# Altium PCB PCB.PcbDoc
Units mil, origin at the board's own origin, x right, y up, seen from the top; angles counter-clockwise.
Board outline 3543.31 x 1574.8 mil, 2 copper layers (Top Layer, Bottom Layer); 60 components, 48 nets, 212 pads, 49 vias.
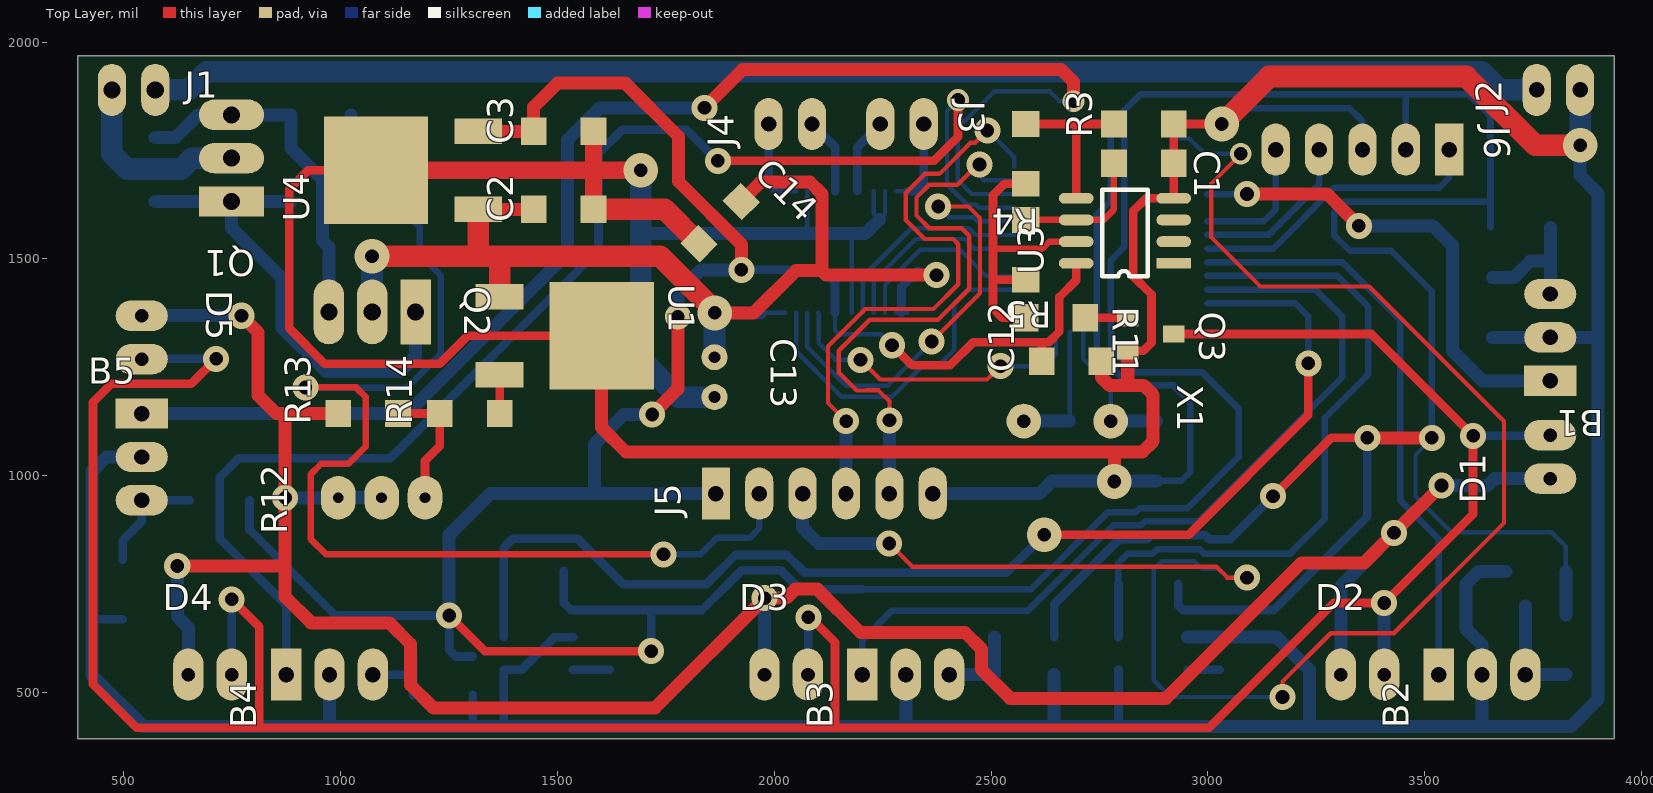
[diagram p0: Top Layer view]
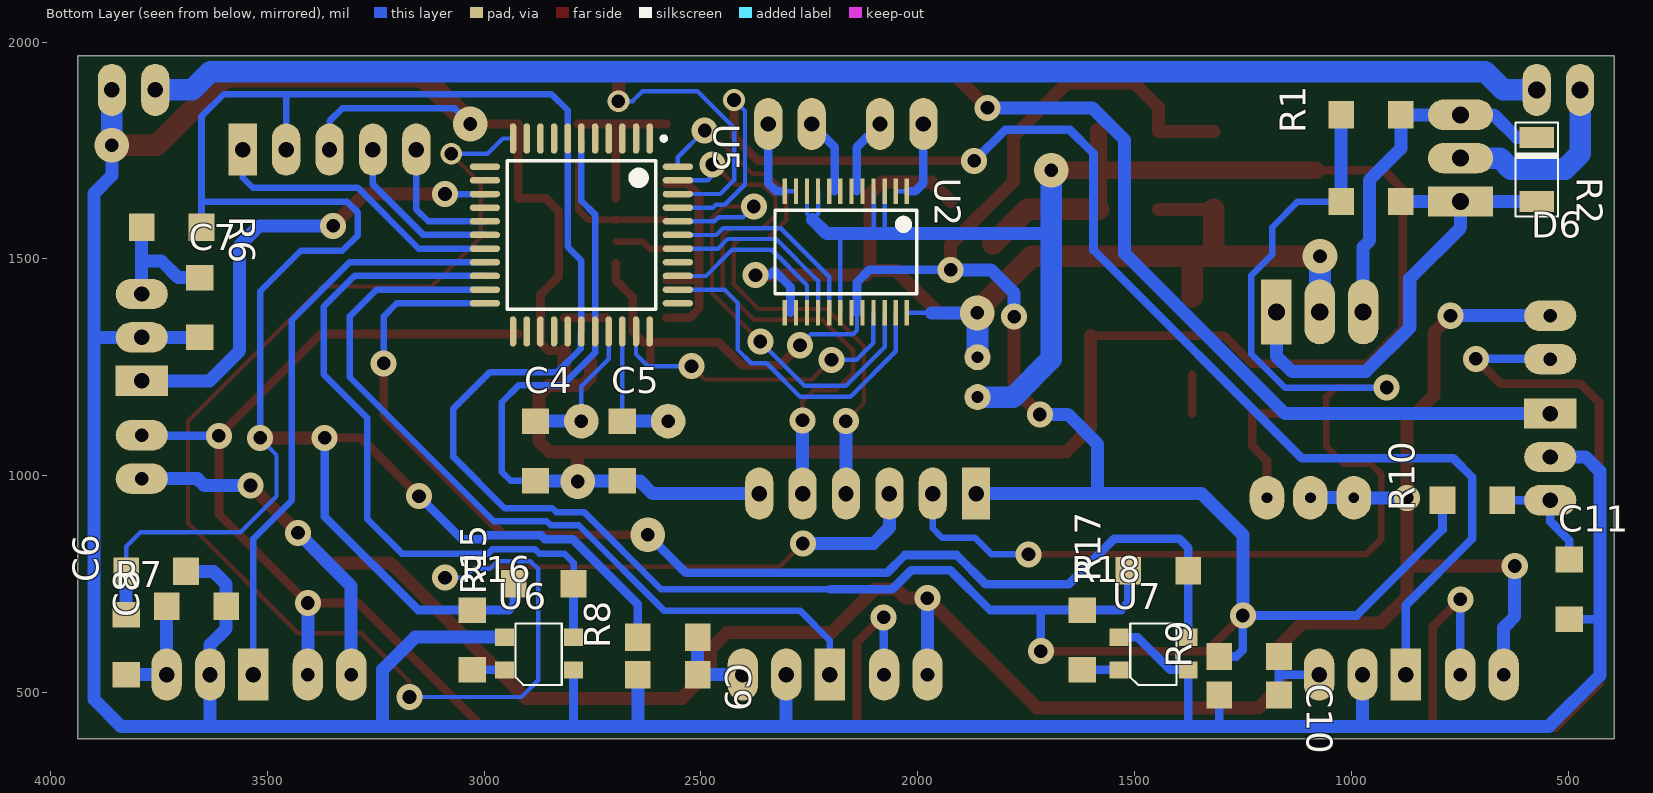
[diagram p1: Bottom Layer view, seen from below]

## Layer stack, top to bottom
Top Solder: solder mask 0.4, Solder Resist, Dk 3.5
Top Layer: signal copper 1.4
Dielectric 1: dielectric 12.6, FR-4, Dk 4.8
Bottom Layer: signal copper 1.4
Bottom Solder: solder mask 0.4, Solder Resist, Dk 3.5

## Board outline
393.7,393.7 3937.01,393.7 3937.01,1968.5 393.7,1968.5

## Design rules (kind name [scope] priority, off if disabled: settings)
Clearance [All] p1: gap=15
PolygonConnect [All] p1: connectstyle=Relief reliefconductorwidth=10 reliefentries=4 polygonreliefangle="90 Angle" airgapwidth=10
RoutingVias [All] p1: holewidth=31.5 width=80 viastyle="Through Hole" minholewidth=31.5 minwidth=50 maxholewidth=31.5 maxwidth=100
SolderMaskExpansion [All] p1: expansion=4
Width [All] p1: maxlimit=50 minlimit=10 preferedwidth=30
30 further rules are at their usual default settings.

## Components (designator, comment, footprint, x,y, rotation, side; value= is the part's Value field where it differs from the comment)
B1 "TSSP58038" TSSP58038 3789.37,1218.9 r180 top
B2 "TSSP58038" TSSP58038 3531.89,541.34 r90 top
B3 "TSSP58038" TSSP58038 2203.15,541.34 r90 top
B4 "TSSP58038" TSSP58038 874.41,541.34 r90 top
B5 "TSSP58038" TSSP58038 541.34,1143.31 r0 top
C1 "CAP-CER" C1206 2852.17,1720.87 r0 top
C2 "CAP-CER" C1206 1514.17,1614.17 r180 top
C3 "CAP-CER" C1206 1514.17,1794.17 r180 top
C4 "CAP-CER" C1206 2881.5,1057.09 r90 bottom
C5 "CAP-CER" C1206 2681.1,1057.09 r90 bottom
C6 "CAP-CER" C1206 3756.3,779.53 r0 bottom
C7 "CAP-CER" C1206 3655.91,1387.8 r90 bottom
C8 "CAP-CER" C1206 3662.99,699.21 r0 bottom
C9 "CAP-CER" C1206 2576.38,541.34 r180 bottom
C10 "CAP-CER" C1206 1235.83,494.49 r180 bottom
C11 "CAP-CER" C1206 497.24,737.8 r90 bottom
C12 "CAP-CER" C1206 2685.43,1263.78 r180 top
C13 "CAP-ELEC" CAP-ELEC-5x11x2mm 1862.2,1212.23 r270 top
C14 "CAP-CER" C1206 1875.1,1583.57 r45 top
D1 "LED" LED-5MM-CLEAR 3789.37,1043.31 r90 top
D2 "LED" LED-5MM-CLEAR 3356.3,541.34 r0 top
D3 "LED" LED-5MM-CLEAR 2027.56,541.34 r0 top
D4 "LED" LED-5MM-CLEAR 698.82,541.34 r0 top
D5 "LED" LED-5MM-CLEAR 541.34,1318.9 r270 top
D6 "1N759" SOD-80 572.44,1706.1 r90 bottom
J1 "Bateria 1" "HEADER 1x2"#1 522.44,1889.76 r90 top
J2 "Bateria 2" "HEADER 1x2"#2 3808.27,1889.76 r90 top
J3 "Motor L" "HEADER 1x2"#2 2294.45,1811.02 r270 top
J4 "Motor R" "HEADER 1x2"#2 2036.97,1811.02 r90 top
J5 "Placa UI" "Header 1x6" 1865.35,958.66 r90 top
J6 "PICkit" "Header 1x5" 3556.3,1751.97 r270 top
Q1 "IRF4905" TO-220 748.03,1632.28 r180 top
Q2 "IRF4905" TO-220 1172.83,1377.95 r270 top
Q3 "MMBT2222A" SOT-23 2941.06,1601.77 r270 top
R1 "RES" R1206 954.72,1832.28 r0 bottom
R2 "RES" R1206 954.72,1632.28 r180 bottom
R3 "RES" R1206 2852.17,1811.02 r180 top
R4 "RES" R1206 2579.53,1742.13 r270 top
R5 "RES" R1206 2579.53,1520.87 r270 top
R6 "RES" R1206 3720.47,1572.83 r180 bottom
R7 "RES" R1206 3825.2,610.24 r90 bottom
R8 "RES" R1206 2576.38,627.56 r0 bottom
R9 "RES" R1206 1235.83,583.07 r0 bottom
R10 "RES" R1206 720.87,943.31 r0 bottom
R11 "RES" R1206 2648.43,1364.57 r0 top
R12 "POT" TRIMPOT 1094.49,949.21 r180 top
R13 "RES" R1206 1063.39,1143.31 r180 top
R14 "RES" R1206 1297.64,1143.31 r180 top
R15 "RES" R1206 2862.6,751.18 r0 bottom
R16 "RES" R1206 3027.56,621.26 r90 bottom
R17 "RES" R1206 1445.28,780.71 r0 bottom
R18 "RES" R1206 1620.87,621.26 r90 bottom
U1 "LM7805" TO-252 1522.05,1322.83 r270 top
U2 "TB6612FNG" SSOP24 2165.71,1515.67 r270 bottom
U3 "LM358D" SOIC-8 3136.06,1489.76 r180 top
U4 "LM7805" TO-252 1161.81,1704.17 r90 top
U5 "PIC18F4550-I/PT" TQFP-PT44_N 2775.59,1555.12 r270 bottom
U6 "QRE1113GR" QRE1113GR 2874.02,590.55 r180 bottom
U7 "QRE1113GR" QRE1113GR 1456.69,590.55 r180 bottom
X1 "XTAL" HC-49/S 2655.59,1125.98 r0 top

## Footprints (in the part's own frame and the unit in brackets; to place one, negate y for a bottom-side part, rotate by r counter-clockwise, add the part's x,y. Pads: shape width x height; smd on the part's side, far side on the other; paste and mask are expansions set on the pad)
C1206 [mm]
  rect 1.5x1.6 smd: 1(-1.75,0) 2(1.75,0)
  body extent -1.6,-0.76 1.6,0.84, height 1.26
CAP-ELEC-5x11x2mm [mil]
  round 60 hole 27.56: 1(-61,0) 2(31,0)
  body extent -114,-99 84,99, height 454
HC-49/S [mil]
  round 80 hole 31.5: 1(-80,0) 2(120,0)
  body extent -203,-90 243,93, height 138
"HEADER 1x2"#1 [mil]
  oval 120x65 hole 39.37: 1(0,50) 2(0,-50)
  body extent -49,-100 49,100, height 336
"HEADER 1x2"#2 [mil]
  oval 120x65 hole 35.43: 1(0,50) 2(0,-50)
  body extent -49,-100 49,100, height 336
"Header 1x5" [mil]
  rect 120x65 hole 35.43: 1(0,0)
  oval 120x65 hole 35.43: 2(0,-100) 3(0,-200) 4(0,-300) 5(0,-400)
  body extent -49,-450 49,50, height 336
"Header 1x6" [mil]
  rect 120x65 hole 35.43: 1(0,0)
  oval 120x65 hole 35.43: 2(0,-100) 3(0,-200) 4(0,-300) 5(0,-400) 6(0,-500)
  body extent -49,-550 49,50, height 336
LED-5MM-CLEAR [mil]
  oval 70x120 hole 31.5: A(-50,0) K(50,0)
  body extent -118,-118 98,118, height 346
QRE1113GR [mm]
  rect 1.1x1 smd: A(-2.01,-0.97) C(2.04,0.94) E(-2.01,0.94) K(2.04,-0.97)
  silkscreen extent -1.35,-1.85 1.35,1.75, body extent -2.4,-1.8 2.4,1.8, height 1.83
R1206 [mm]
  rect 1.5x1.6 smd: 1(-1.75,0) 2(1.75,0)
  body extent -1.6,-0.76 1.6,0.84, height 0.68
SOD-80 [mm]
  rect 1.25x2 smd: A(-1.875,0) K(1.875,0)
  silkscreen extent -2.75,-1.25 2.75,1.25, body extent -1.8,-0.75 1.8,0.75, height 1.5
SOIC-8 [mil]
  rect 80x25 smd: 1(215,0)
  oval 80x25 smd: 2(215,-50) 3(215,-100) 4(215,-150) 5(440,-150) 6(440,-100) 7(440,-50) 8(440,0)
  silkscreen extent 275,-170 380,30, body extent 212,-171 448,21, height 69
SOT-23 [mil]
  rect 40x50 smd: B(237.2,-125.98) C(275,-20) E(313.98,-125.98)
  body extent 218,-124 333,-27, height 38
SSOP24 [mm]
  rect 1.5x0.25 smd: 1(-3.562,3.575) 2(-3.562,2.925) 3(-3.562,2.275) 4(-3.562,1.625) 5(-3.562,0.975) 6(-3.562,0.325) 7(-3.562,-0.325) 8(-3.562,-0.975) 9(-3.562,-1.625) 10(-3.562,-2.275) 11(-3.562,-2.925) 12(-3.562,-3.575) 13(3.562,-3.575) 14(3.562,-2.925) 15(3.562,-2.275) 16(3.562,-1.625) 17(3.562,-0.975) 18(3.562,-0.325) 19(3.562,0.325) 20(3.562,0.975) 21(3.562,1.625) 22(3.562,2.275) 23(3.562,2.925) 24(3.562,3.575)
  silkscreen extent -2.45,-4.15 2.45,4.15, body extent -3.8,-4.15 3.8,4.15, height 1.6
TO-220 [mil]
  rect 150x70 hole 39.37: 1(0,0)
  oval 150x70 hole 39.37: 2(0,-100) 3(0,-200)
  body extent -64,-305 114,101, height 661
TO-252 [mm]
  rect 1.5x2.8 smd: 1(-2.286,-3.95) 3(2.286,-3.95)
  rect 6.3x6.1 smd: 2(0,2.03)
  body extent -3.27,-4.96 3.27,4.98, height 2.41
TQFP-PT44_N [mil] "Thin QFP, 44-Leads, Body 10x10mm, Pitch 0.8mm, IPC Medium Density"
  oval 70x15 smd: 1(-222.44,157.48) 2(-222.44,125.98) 3(-222.44,94.49) 4(-222.44,62.99) 5(-222.44,31.5) 6(-222.44,0) 7(-222.44,-31.5) 8(-222.44,-62.99) 9(-222.44,-94.49) 10(-222.44,-125.98) 11(-222.44,-157.48) 23(222.44,-157.48) 24(222.44,-125.98) 25(222.44,-94.49) 26(222.44,-62.99) 27(222.44,-31.5) 28(222.44,0) 29(222.44,31.5) 30(222.44,62.99) 31(222.44,94.49) 32(222.44,125.98) 33(222.44,157.48)
  oval 15x70 smd: 12(-157.48,-222.44) 13(-125.98,-222.44) 14(-94.49,-222.44) 15(-62.99,-222.44) 16(-31.5,-222.44) 17(0,-222.44) 18(31.5,-222.44) 19(62.99,-222.44) 20(94.49,-222.44) 21(125.98,-222.44) 22(157.48,-222.44) 34(157.48,222.44) 35(125.98,222.44) 36(94.49,222.44) 37(62.99,222.44) 38(31.5,222.44) 39(0,222.44) 40(-31.5,222.44) 41(-62.99,222.44) 42(-94.49,222.44) 43(-125.98,222.44) 44(-157.48,222.44)
  silkscreen extent -227,-171 171,195, body extent -197,-197 197,197, height 47
TRIMPOT [mil]
  oval 80x100 hole 25: 1(-100,0) 2(0,0) 3(100,0)
  body extent -188,-94 188,94, height 455
TSSP58038 [mil]
  rect 120x70 hole 35.43: 1(0,0)
  oval 120x70 hole 35.43: 2(0,-100) 3(0,-200)
  body extent -134,-213 55,15, height 337

## Part data
D6: library part ZENER
J1 J2 J3 J4: library part "Header 1x2"
J5: library part "Header 1x6"
Q1 Q2: library part P-MOSFET
Q3: library part NPN
U1 U4: library part LM78XX
U2: "otor / Motion / Ignition Controllers & Drivers Brush Motor Driver IC"
U3: library part LM358
U5: "High Performance, Enhanced Flash, USB Microcontroller with nanoWatt Technology, 32K Flash, 44-Pin TQFP, Industrial Temperature Range"

## Via types
v1: diameter 60, hole 31.5, Top Layer to Bottom Layer, 39 vias
v2: diameter 80, hole 31.5, Top Layer to Bottom Layer, 7 vias
v3: diameter 50, hole 31.5, Top Layer to Bottom Layer, 3 vias

## Nets (pads, with @x,y where several pads share a name; then routed paths per layer and width w, separated by ;. In a path a pad name is that pad's centre, name@x,y a point inside that pad or via, vN(x,y) a via of type N, cw(c..) or ccw(c..) an arc to the next point about the centre after c; other vN are vias at no path point)
38KHZ: R4.2 R5.2 R11.1 U3.7 | length 704.7
  Top Layer w15: 2504.33,1523.23 2617.32,1523.23 2633.86,1539.76 U3.7
  Top Layer w20: R11.1 2525.59,1364.57 2504.33,1385.83 2504.33,1451.97 ; R5.2 2504.33,1451.97 ; R4.2 2531.1,1673.23 2504.33,1646.46 2504.33,1523.23 2504.33,1451.97
BTN1: J5.5 U5.43 | length 1359.2
  Top Layer w10: v1(2265.75,1127.56) 2265.75,1169.69 2266.54,1170.47 2240.24,1196.77 2213.31,1196.77 2212.99,1196.46 2190.16,1196.46 2148.82,1237.8 2148.82,1288.03 2220.23,1359.45 2377.64,1359.45 2449.33,1431.14 2449.33,1553.43 2431.89,1570.86 2357.24,1570.86 2327.95,1600.15 2327.95,1641.57 2357.4,1671.02 2422.2,1671.02 2468.95,1717.77 v1(2473.15,1717.77)
  Bottom Layer w10: v1(2473.15,1717.77) 2473.15,1692.2 2484.25,1681.1 U5.43
  Bottom Layer w30: J5.5@2265.35,959.06 2265.75,959.45 v1(2265.75,1127.56)
BTN2: J5.4 U5.44 | length 1372.9
  Top Layer w10: v1(2165.75,1125.98) 2123.82,1167.91 2123.82,1298.39 2209.88,1384.45 2367.28,1384.45 2424.33,1441.5 2424.33,1533.94 2412.4,1545.86 2346.88,1545.86 2302.95,1589.8 2302.95,1651.93 2347.04,1696.02 2380.69,1696.02 2452.44,1767.77 2463.05,1767.77 v1(2491.34,1796.06)
  Bottom Layer w10: v1(2491.34,1796.06) 2553.15,1734.25 U5.44
  Bottom Layer w30: J5.4@2165.35,959.06 2165.75,959.45 v1(2165.75,1125.98)
CNY1: R15.1 U5.20 U6.C | length 1629.4
  Bottom Layer w15: R15.1 2793.7,799.21 2814.96,820.47 2872.59,820.47 2882.29,830.18 2980.7,830.18 2990.4,820.47 3189.37,820.47 3269.68,900.79 3269.68,1133.46 3369.68,1233.46 3369.68,1390.16 3300.96,1458.88 3299.36,1458.88 3297.61,1460.63 U5.20
  Bottom Layer w20: U6.C R15.1
CNY2: R17.1 U5.22 U7.C | length 2782.1
  Top Layer w20: v2(2622.44,864.17) 2955.51,864.17 3231.5,1140.16 v1(3231.5,1259.06)
  Bottom Layer w15: U5.22 3201.18,1397.64 3231.5,1367.32 v1(3231.5,1259.06)
  Bottom Layer w20: U7.C R17.1 1376.38,833.86 1396.85,854.33 1547.05,854.33 1651.77,749.61 1843.02,749.61 1910.7,817.28 2029.46,817.28 2070.36,776.38 2534.64,776.38 v2(2622.44,864.17)
GND: B1.2 B2.2 B3.2 B4.2 B5.2 C1.2 C2.1 C3.1 C4.1 C5.1 C6.1 C7.1 C8.1 C9.1 C10.1 C11.1 C12.1 C13.2 C14.1 J2.2 J5.6 J6.3 Q3.E R3.1 U1.2 U2.3 U2.4 U2.9 U2.10 U2.18 U3.4 U4.2 U5.6 U5.29 U6.E U6.K U7.E U7.K | length 17379.2
  Top Layer w20: U4.2 925.43,1704.17 881.5,1660.24 881.5,1339.76 962.99,1258.27 1228.74,1258.27 1293.31,1322.83 U1.2 ; Q3.E 2850.59,1287.8 2869.68,1306.89 2869.68,1418.11 2827.95,1459.84 2827.95,1610.24 2857.48,1639.76 U3.4 C1.2 R3.1 v2(3031.5,1811.02)
  Top Layer w30: U1.2 1601.97,1110.63 1657.87,1054.72 2784.25,1054.72 ; C12.1 2754.33,1226.77 2772.56,1208.54 2815.08,1208.54 ; v2(2784.25,986.61) 2784.25,1054.72 ; Q3.E 2815.08,1208.54 ; 2784.25,1054.72 2848.82,1054.72 2873.62,1079.53 2873.62,1186.61 2851.69,1208.54 2815.08,1208.54
  Top Layer w40: U4.2 1583.07,1704.17 ; C2.1 1583.07,1704.17 ; C3.1 1583.07,1704.17 ; v2(1691.73,1704.17) 1583.07,1704.17
  Top Layer w50: C2.1 1747.05,1614.17 C14.1 ; v2(3031.5,1811.02) 3140.94,1920.47 3596.06,1920.47 3754.72,1761.81 v2(3858.27,1761.81)
  Bottom Layer w10: 2076.14,1558.19 U2.3 ; 2101.73,1558.19 U2.4 ; U2.18 2178.5,1558.19 ; U2.9 2229.69,1603.74 2242.48,1590.94 2255.28,1603.74 U2.10
  Bottom Layer w15: U5.6 2775.59,1633.86 2744.09,1602.36 U5.29 2744.09,1283.32 2818.36,1209.06 2919.68,1209.06 2959.06,1169.68 2959.06,1008.66 2938.58,988.19 C4.1 ; v2(3031.5,1811.02) 3067.32,1846.85 3327.17,1846.85 3356.3,1817.72 J6.3
  Bottom Layer w20: 427.17,668.9 C11.1 ; 1304.72,422.05 C10.1 ; 1376.38,422.05 U7.K 1417.72,552.36 1492.91,627.56 U7.E ; 2793.7,422.05 U6.K
  Bottom Layer w30: B5.2 459.84,1043.31 427.17,1010.63 427.17,668.9 427.17,539.37 544.49,422.05 974.41,422.05 ; B4.2 974.41,422.05 ; 1691.73,1558.19 2076.14,1558.19 2101.73,1558.19 2178.5,1558.19 2209.72,1558.19 2242.48,1590.94 ; B3.2 2303.15,422.05 ; J5.6 2611.42,958.66 2640.94,988.19 C5.1 C4.1 ; C9.1 2645.28,422.05 ; U6.E 3159.05,627.56 3233.86,552.76 3233.86,422.05 ; C7.1 B1.2 3899.21,1318.9 ; C6.1 3624.41,779.53 3594.88,750 3594.88,647.24 3631.89,610.24 B2.2 3631.89,422.05 ; v2(3858.27,1761.81) 3858.27,1692.13 3899.21,1651.18 3899.21,1318.9 ; 974.41,422.05 1304.72,422.05 1376.38,422.05 2303.15,422.05 ; 2303.15,422.05 2645.28,422.05 ; 2645.28,422.05 2793.7,422.05 3233.86,422.05 ; 3233.86,422.05 3631.89,422.05 ; 3631.89,422.05 3837.4,422.05 3899.21,483.86 3899.21,1318.9
  Bottom Layer w50: v2(1691.73,1704.17) 1691.73,1558.19 1691.73,1269.29 1779.8,1181.23 C13.2 ; v2(3858.27,1761.81) J2.2
IR1: B1.1 U5.14 | length 1112
  Top Layer w30: v1(3090.16,1649.61) 3274.8,1649.61 v1(3348.03,1576.38)
  Bottom Layer w15: U5.14 v1(3090.16,1649.61)
  Bottom Layer w30: v1(3348.03,1576.38) 3518.11,1576.38 3563.39,1531.1 3563.39,1288.19 3632.68,1218.9 B1.1
IR2: B2.1 U5.19 | length 1357.2
  Bottom Layer w15: U5.19 3310.14,1492.13 3443.7,1358.57 3443.7,942.91 3531.89,854.72 3531.89,547.34 B2.1@3525.89,541.34
IR3: B3.1 U5.21 | length 1914.1
  Bottom Layer w15: B3.1 2203.15,620.87 2270.47,688.19 2583.96,688.19 2781.81,886.04 2846.24,886.04 2855.37,895.18 2977.46,895.18 3309.45,1227.17 3309.45,1367.32 3247.64,1429.13 U5.21
IR4: B4.1 U5.41 | length 3204.6
  Top Layer w20: v1(1869.72,1726.02) 2368.27,1726.02 2423.62,1781.38 v3(2423.62,1866.54)
  Bottom Layer w10: v3(2423.62,1866.54) 2398.15,1841.06 2398.15,1670.86 2398.66,1670.86 2444.92,1624.61 2465.63,1624.61 2472.13,1618.11 U5.41
  Bottom Layer w20: B4.1 874.41,701.57 720.87,855.12 720.87,996.06 765.35,1040.55 1114.57,1040.55 1594.49,1520.47 1594.49,1742.91 1649.61,1798.03 1797.72,1798.03 v1(1869.72,1726.02)
IR5: B5.1 U5.42 | length 3261.5
  Top Layer w30: v1(1838.98,1848.43) 1927.17,1936.61 2661.42,1936.61 2690.16,1907.87 v3(2690.16,1863.78)
  Bottom Layer w10: U5.42 2455.27,1649.61 2437.35,1667.53 2437.35,1667.77 2423.15,1681.97 2423.15,1801.89 2507.8,1886.54 2634.72,1886.54 2657.48,1863.78 v3(2690.16,1863.78)
  Bottom Layer w30: B5.1 1153.54,1143.31 1522.83,1512.6 1522.83,1774.02 1597.24,1848.43 v1(1838.98,1848.43)
LED: J5.3 U5.11 | length 4120.4
  Top Layer w10: v1(2264.96,843.7) 2318.5,790.16 3019.68,790.16 3044.88,764.96 v1(3090.16,764.96) ; v3(3075.98,1742.12) 3007.87,1674.01 3007.87,1549.21 3120.87,1436.22 3372.05,1436.22 3682.68,1125.59 3682.68,890.95 3428.35,636.61 3283.07,636.61 3172.05,525.59 v1(3172.05,489.76)
  Bottom Layer w10: U5.11 2957.09,1777.56 2992.52,1742.12 v3(3075.98,1742.12) ; v1(3090.16,764.96) 3044.88,764.96 3024.35,785.49 2986.49,785.49 2969.31,802.68 2893.68,802.68 2883.98,792.97 2882.68,792.97 2875.2,785.49 2875.2,528.35 2913.78,489.76 v1(3172.05,489.76)
  Bottom Layer w30: J5.3@2065.35,959.06 J5.3 2065.35,880.32 2101.97,843.7 v1(2264.96,843.7)
MOTDA: U2.21 U5.32 | length 728.7
  Top Layer w10: v1(2198.82,1267.32) 2244.37,1221.77 2490.67,1221.77 v1(2521.65,1252.75)
  Bottom Layer w10: U2.21 2102.4,1374.76 2102.4,1305.87 2140.94,1267.32 v1(2198.82,1267.32) ; v1(2521.65,1252.75) 2622.44,1252.75 2649.61,1279.92 U5.32
MOTDB: U2.22 U5.40 | length 1072.8
  Top Layer w10: v1(2362.99,1309.45) 2474.33,1420.79 2474.33,1594.57 2448.03,1620.86 v1(2377.95,1620.86)
  Bottom Layer w10: U2.22 2076.14,1296.77 2165.59,1207.32 2260.87,1207.32 v1(2362.99,1309.45) ; v1(2377.95,1620.86) 2402.95,1595.86 2459.02,1595.86 2468.27,1586.61 U5.40
MOTDP: U2.23 U5.35 | length 799.9
  Bottom Layer w10: U2.23 2050.55,1287.01 2155.23,1182.32 2271.22,1182.32 2348.35,1259.45 2383.7,1259.45 2415.35,1291.1 2415.35,1399.21 2445.28,1429.13 U5.35
MOTIA: U2.17 U5.39 | length 485.5
  Bottom Layer w10: U2.17 2204.09,1458.96 2315.99,1570.86 2448.67,1570.86 2464.41,1555.12 U5.39
MOTIB: U2.16 U5.38 | length 446.5
  Bottom Layer w10: U2.16 2229.69,1449.2 2326.35,1545.86 2438.31,1545.86 2460.55,1523.62 U5.38
MOTIP: U2.15 U5.36 | length 420.6
  Bottom Layer w10: U2.15 2255.28,1439.43 2336.7,1520.86 2427.96,1520.86 2488.19,1460.63 U5.36
NetB1_3: B1.3 C7.2 R6.1 | length 303.4
  Bottom Layer w30: C7.2 3705.12,1456.69 3743.7,1495.28 3789.37,1495.28 ; B1.3 3789.37,1495.28 ; R6.1 3789.37,1495.28
NetB2_3: B2.3 C8.2 R7.1 | length 251.2
  Bottom Layer w30: C8.2 B2.3 R7.1
NetB3_3: B3.3 C9.2 R8.1 | length 190.6
  Bottom Layer w30: B3.3 C9.2 R8.1
NetB4_3: B4.3 C10.2 R9.1 | length 181.1
  Bottom Layer w20: B4.3 1166.93,541.34 ; C10.2 1166.93,541.34 ; R9.1 1166.93,541.34
NetB5_3: B5.3 C11.2 R10.1 | length 265.5
  Bottom Layer w20: C11.2 497.24,850.79 541.34,894.88 B5.3 R10.1
NetC1_1: C1.1 R5.1 U3.6 | length 320.7
  Top Layer w15: R5.1 U3.6 2759.05,1589.76 2783.27,1613.98 C1.1
NetD1_A: D1.A D2.A D3.A D4.A D5.A R12.2 R12.3 R13.2 | length 5874.6
  Top Layer w30: v1(623.23,791.73) 872.05,791.73 ; v1(771.26,1368.9) 809.45,1330.71 809.45,1185.43 851.57,1143.31 872.05,1143.31 ; R13.2 872.05,1143.31 ; v1(3538.58,977.56) v1(3429.13,868.11) 3360.24,799.21 3215.75,799.21 2903.15,486.61 2544.09,486.61 2477.56,553.15 2477.56,600.79 2439.76,638.58 2198.82,638.58 2099.17,738.23 2048.07,738.23 2027.56,717.72 v1(1977.95,717.72) 1724.8,464.57 1213.78,464.57 1161.02,517.32 1161.02,611.81 1112.2,660.63 931.89,660.63 872.05,720.47 872.05,791.73 ; 872.05,791.73 v1(872.05,948.82) 872.05,1143.31
  Bottom Layer w30: D5.A v1(771.26,1368.9) ; v1(623.23,791.73) 623.23,675.2 648.82,649.61 D4.A ; v1(872.05,948.82) 994.09,948.82 R12.3 R12.2 ; D3.A@1977.95,541.73 v1(1977.95,717.72) ; D2.A 3306.3,745.28 v1(3429.13,868.11) ; v1(3538.58,977.56) 3645.28,977.56 3661.02,993.31 D1.A
NetD1_K: D1.K D2.K D3.K D4.K D5.K Q3.C | length 6800.5
  Top Layer w20: v1(712.99,1269.68) 655.51,1212.2 471.65,1212.2 428.74,1169.29 428.74,518.9 529.13,418.5 812.2,418.5 ; v1(748.82,714.96) 812.2,651.57 812.2,418.5 ; v1(2078.35,673.23) 2082.95,673.23 2140.16,616.02 2140.16,418.5 ; Q3.C 3376.77,1326.77 v1(3611.42,1092.13) 3611.42,911.42 v1(3406.3,706.3) 3290.16,706.3 3002.36,418.5 2140.16,418.5 ; 812.2,418.5 2140.16,418.5
  Bottom Layer w20: D5.K 542.13,1269.68 v1(712.99,1269.68) ; D4.K v1(748.82,714.96) ; D3.K 2076.77,542.13 2078.35,543.7 v1(2078.35,673.23) ; v1(3611.42,1092.13) 3788.19,1092.13 D1.K
  Bottom Layer w30: D2.K v1(3406.3,706.3)
NetD6_A: D6.A Q1.1 Q2.1 R2.2 | length 1119.2
  Bottom Layer w30: D6.A Q1.1 ; R2.2 Q1.1 ; Q2.1 1172.83,1275.59 1137.4,1240.16 966.74,1240.16 865.35,1341.54 865.35,1454.72 748.03,1572.05 Q1.1
NetD6_K: D6.K Q1.3 Q2.3 R1.1 | length 825.4
  Bottom Layer w30: D6.K 619.29,1779.92 671.65,1832.28 Q1.3 R1.1 885.83,1754.72 958.27,1682.28 958.27,1542.13 972.83,1527.56 Q2.3
NetJ1_1: J1.1 Q1.2 | length 448.2
  Bottom Layer w50: J1.1 472.44,1742.13 507.48,1707.09 631.89,1707.09 657.09,1732.28 Q1.2
NetJ1_2: J1.2 J2.1 | length 3220.4
  Bottom Layer w50: J1.2 649.61,1889.76 691.38,1931.54 3631.06,1931.54 3672.83,1889.76 J2.1
NetJ3_1: J3.1 U2.11 U2.12 | length 208.1
  Bottom Layer w10: U2.11 U2.12
  Bottom Layer w20: U2.12 2326.3,1655.91 2344.45,1674.06 J3.1
NetJ3_2: J3.2 U2.7 U2.8 | length 177.2
  Bottom Layer w20: 2191.02,1655.91 2191.02,1757.6 J3.2
NetJ4_1: J4.1 U2.1 U2.2 | length 207.9
  Bottom Layer w10: U2.1 U2.2
  Bottom Layer w20: J4.1 1986.97,1674.37 2005.43,1655.91 U2.1
NetJ4_2: J4.2 U2.5 U2.6 | length 177.3
  Bottom Layer w20: J4.2 2140.49,1757.5 2140.49,1655.91
NetQ3_B: Q3.B R11.2 | length 97.8
  Top Layer w20: R11.2 Q3.B
NetR3_2: R3.2 R4.1 U3.5 | length 375
  Top Layer w20: R4.1 2696.06,1811.02 ; U3.5 2696.06,1811.02 ; R3.2 2696.06,1811.02
NetR12_1: R12.1 R13.1 R14.2 | length 304.7
  Top Layer w20: R13.1 R14.2 1228.74,1068.5 1194.49,1034.25 R12.1
NetR14_1: R14.1 U1.3 | length 89.5
  Top Layer w20: R14.1 U1.3
NetR16_1: R16.1 U6.A | length 74.4
  Bottom Layer w20: U6.A R16.1
NetR18_1: R18.1 U7.A | length 85
  Bottom Layer w20: U7.A R18.1
PGC: J6.5 U5.16 | length 307.5
  Bottom Layer w15: U5.16 3128.83,1586.61 3156.3,1614.08 J6.5
PGD: J6.4 U5.17 | length 386.9
  Bottom Layer w15: U5.17 3139.76,1555.12 3256.3,1671.65 J6.4
SWITCH: J5.2 R1.2 R2.1 | length 2764.6
  Top Layer w15: v1@915.35,1200.39 v1(918.5,1203.54) 1035.44,1203.54 1058.27,1180.71 1058.27,1067.72 1018.11,1027.56 955.51,1027.56 930.71,1002.76 930.71,854.33 966.54,818.5 v1(1744.49,818.5)
  Bottom Layer w15: v1(918.5,1203.54) 919.39,1202.66 1152.93,1202.66 1230.33,1280.06 1230.33,1462.27 1182.68,1509.93 1182.68,1573.23 1123.62,1632.28 R2.1 ; v1(1744.49,818.5) 1829.53,818.5 1868.11,857.09 1943.7,857.09 1965.35,878.74 J5.2
  Bottom Layer w30: R2.1 R1.2
VBAT: C2.2 C13.1 C14.2 Q2.2 U1.1 U2.13 U2.14 U2.24 U4.1 | length 2705
  Top Layer w30: U4.1 C2.2 ; v2(1862.76,1375.43) 1952.6,1375.43 2050,1472.83 2109.45,1472.83 ; C14.2 1968.7,1677.17 2082.28,1677.17 2109.45,1650 2109.45,1472.83 ; v1(2374.01,1462.6) 2119.69,1462.6 2109.45,1472.83
  Top Layer w50: v2(1072.44,1506.3) 1317.32,1506.3 ; U4.1 1317.32,1506.3 ; U1.1 1366.54,1504.72 1364.96,1506.3 ; v2(1862.76,1375.43) 1862.76,1380.73 1737.18,1506.3 1364.96,1506.3 ; 1317.32,1506.3 1364.96,1506.3
  Bottom Layer w10: 1968.5,1375.43 U2.24 ; U2.14 2293.31,1375.43 U2.13
  Bottom Layer w20: 2293.31,1375.43 2293.31,1435.04 2331.1,1472.83 2341.34,1462.6 v1(2374.01,1462.6)
  Bottom Layer w30: v2(1862.76,1375.43) 1968.5,1375.43
  Bottom Layer w50: v2(1072.44,1506.3) 1072.44,1378.35 Q2.2 ; C13.1 1862.2,1374.88 v2(1862.76,1375.43)
VCC: C3.2 C6.2 C12.2 J5.1 J6.2 R6.2 R7.2 R8.2 R9.2 R10.2 R15.2 R16.2 R17.2 R18.2 U2.19 U2.20 U3.8 U4.3 U5.7 U5.28 | length 12760.1
  Top Layer w20: v1(1250.39,677.56) 1332.68,595.28 v1(1716.14,595.28) ; v1(2271.34,1300.87) 2317.76,1254.45 2405.33,1254.45 2458.95,1308.07 2616.54,1308.07 ; C12.2 2616.54,1308.07 ; U3.8 2696.06,1450.79 2657.48,1412.2 2657.48,1332.68 2632.87,1308.07 2616.54,1308.07 ; v1(3150,952.76) 3284.64,1087.4 v1(3367.72,1087.4)
  Top Layer w30: U4.3 C3.2 1445.28,1850.39 1500,1905.12 1656.3,1905.12 1779.13,1782.28 1779.13,1678.35 1924.06,1533.43 v1(1924.06,1474.65) ; v1(1718.5,1141.34) 1777.56,1200.39 v1(1777.56,1366.93) ; v1(3367.72,1087.4) v1(3516.13,1087.4)
  Bottom Layer w10: 2140.08,1375.43 2140.08,1335.51 2149.69,1325.91 2246.3,1325.91 v1(2271.34,1300.87) ; v1(3516.13,1087.4) 3516.13,1085.03 3478.58,1047.48 3478.58,952.71 3561.6,869.68 3792.13,869.68 3825.2,836.61 C6.2
  Bottom Layer w15: 2201.97,737.8 2591.14,737.8 2769.39,916.04 2833.81,916.04 2842.94,925.18 2952.74,925.18 3070.47,1042.91 3070.47,1154.72 2986.14,1239.06 2830.78,1239.06 2777.09,1292.75 2777.09,1331.18 U5.28 2775.59,1496.06 2807.09,1527.56 U5.7 2807.09,1842.52 2844.49,1879.92 3456.3,1879.92 ; J6.2 3456.3,1879.92 ; v1(3516.13,1087.4) 3516.13,1425.2 3422.83,1518.5 3327.17,1518.5 3290.94,1554.72 3290.94,1606.69 3315.63,1631.38 3651.57,1631.38 ; R6.2 3651.57,1631.38 ; 3456.3,1879.92 3600.39,1879.92 3651.57,1828.74 3651.57,1631.38
  Bottom Layer w20: R10.2 789.76,875.98 988.19,677.56 v1(1250.39,677.56) 1250.39,598.03 1265.35,583.07 R9.2 ; R17.2 1514.17,707.09 1531.1,690.16 R18.2 1716.14,690.16 ; v1(1716.14,595.28) 1716.14,690.16 ; v1(1924.06,1474.65) 2111.69,1474.65 2140.08,1446.26 2140.08,1375.43 ; 2201.97,738.23 2059.02,738.23 2014.96,782.28 1925.2,782.28 1833.07,690.16 1716.14,690.16 ; R8.2 2645.28,703.54 2795.28,853.54 2859.7,853.54 2868.83,862.68 2994.16,862.68 3003.29,853.54 3050.79,853.54 v1(3150,952.76) ; R15.2 2931.5,701.18 2942.52,690.16 R16.2 3151.97,690.16 3367.72,905.91 v1(3367.72,1087.4)
  Bottom Layer w30: v1(1250.39,677.56) 1250.39,863.78 1345.28,958.66 1585.83,958.66 ; v1(1718.5,1141.34) 1653.54,1141.34 1585.83,1073.62 1585.83,958.66 ; v1(1777.56,1366.93) 1777.56,1421.26 1830.95,1474.65 v1(1924.06,1474.65) ; J5.1 1585.83,958.66 ; R7.2 C6.2
VPP: J6.1 U5.18 | length 690.9
  Bottom Layer w15: U5.18 3150.69,1523.62 3290.95,1663.88 3533.17,1663.88 3556.3,1687.01 J6.1
XTAL1: C4.2 U5.30 X1.2 | length 338.7
  Bottom Layer w10: U5.30 2712.6,1269.29 2775.59,1206.3 X1.2
  Bottom Layer w30: X1.2 C4.2
XTAL2: C5.2 U5.31 X1.1 | length 312.2
  Bottom Layer w10: C5.2 U5.31
  Bottom Layer w30: X1.1 C5.2
pads on no net: U3.1 U3.2 U3.3 U5.1 U5.2 U5.3 U5.4 U5.5 U5.8 U5.9 U5.10 U5.12 U5.13 U5.15 U5.23 U5.24 U5.25 U5.26 U5.27 U5.33 U5.34 U5.37

## Silkscreen, mask and mechanical layers (free items; w line width, h text height)
Mechanical 1:
  the board outline again, w10
Mechanical 15:
  lines w10: 393.7,1181.1 541.34,1181.1 ; 541.34,1043.31 541.34,1181.1 ; 541.34,1318.9 541.34,1181.1 ; 698.82,541.34 836.61,541.34 ; 836.61,393.7 836.61,541.34 ; 974.41,541.34 836.61,541.34 ; 1456.69,393.7 1456.69,590.55 ; 2027.56,541.34 2165.35,541.34 2303.15,541.34 ; 2086.97,1811.02 2165.71,1811.02 2244.45,1811.02 ; 2165.35,393.7 2165.35,1968.5 ; 2874.02,393.7 2874.02,590.55 ; 3356.3,541.34 3494.09,541.34 ; 3494.09,393.7 3494.09,541.34 ; 3631.89,541.34 3494.09,541.34 ; 3789.37,1043.31 3789.37,1181.1 ; 3789.37,1318.9 3789.37,1181.1 ; 3937.01,1181.1 3789.37,1181.1